# EAGLE board LMC303DLH_breakout (EAGLE 5.10)
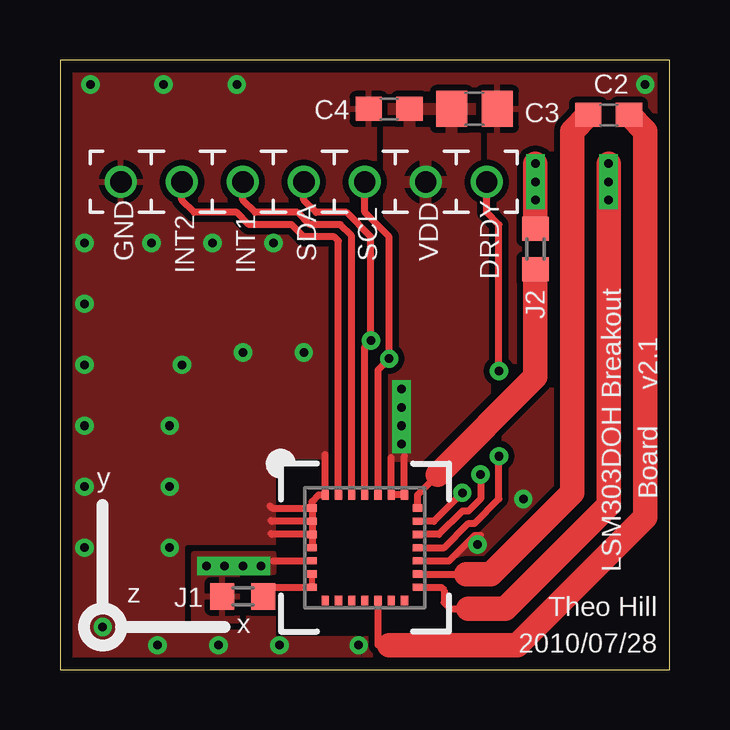
[diagram p0: board, top side]
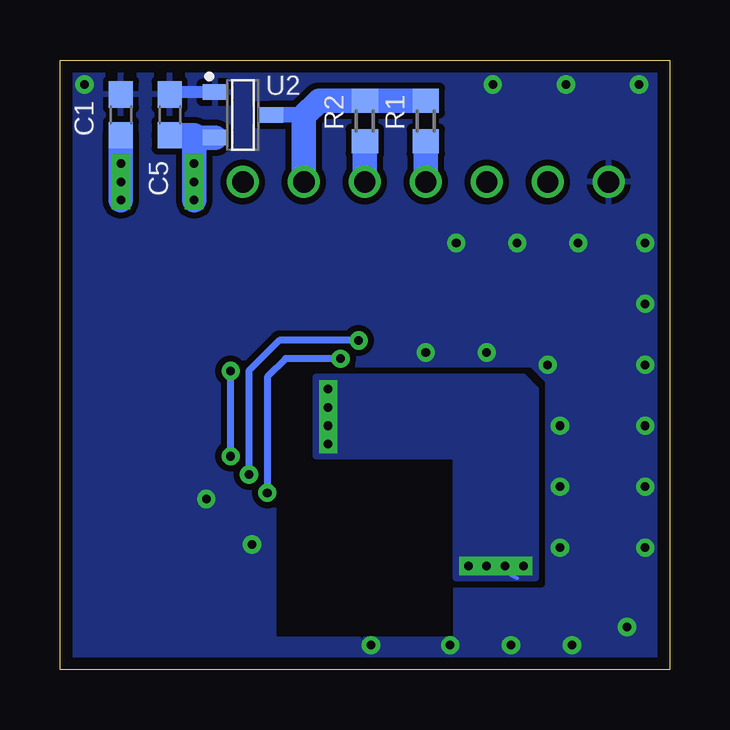
[diagram p1: board, bottom side, seen from below]

Size 25.4 x 25.4 mm. Coordinates in mm from the lower left corner, seen from the top.
Outline: 0,0 25.4,0 25.4,25.4 0,25.4 0,0
Copper layers (1*16): Top 0.0178mm / dielectric 1.4986mm / Bottom 0.0178mm
Design rules "sunstone_eagle_2lyr_rules_v1.0.0.3": minimum track width 6mil, minimum drill 14mil, track to track 6mil, track to pad 6mil, pad to pad 6mil, via to via 6mil, smd to smd 6mil, copper to edge 20mil, drill to drill 16mil, minimum pad ring 8mil, minimum via ring 8mil, stop-mask expansion 3mil, vias tented up to drill 0mil, thermal gap 10mil

## Footprints (pad centres in the part's own frame; a part is rotated, then mirrored left to right if it is on the bottom)
C0603 = smd 1.1 x 1: 1 -0.85,0; 2 0.85,0
C0805 = smd 1.3 x 1.5: 1 -0.95,0; 2 0.95,0
JUMPPAD = drill 0.889 round: PAD 0,0
ZJ-0603 = smd 1 x 1.1: 1 -0.85,0; 2 0.85,0
R0603 = smd 1 x 1.1: 1 -0.85,0; 2 0.85,0
LGA-28L(5X5X1) = smd 0.4 x 0.3: 1 -2.2,1.65; 2 -2.2,1.1; 3 -2.2,0.55; 4 -2.2,0; 5 -2.2,-0.55; 6 -2.2,-1.1; 7 -2.2,-1.65; 15 2.2,-1.65; 16 2.2,-1.1; 17 2.2,-0.55; 18 2.2,0; 19 2.2,0.55; 20 2.2,1.1; 21 2.2,1.65 | smd 0.3 x 0.4: 8 -1.65,-2.2; 9 -1.1,-2.2; 10 -0.55,-2.2; 11 0,-2.2; 12 0.55,-2.2; 13 1.1,-2.2; 14 1.65,-2.2; 22 1.65,2.2; 23 1.1,2.2; 24 0.55,2.2; 25 0,2.2; 26 -0.55,2.2; 27 -1.1,2.2; 28 -1.65,2.2
SOT-23-3 = smd 0.65 x 1.05: 1 -0.95,-1.15; 2 0.95,-1.15; 3 0,1.15

## Placement (x,y rotation side)
C1  4.7n  [C0603]  22.86,23.11 90 bottom
C2  220n  [C0603]  22.86,23.11 180 top
C3  10u  [C0805]  17.27,23.37 180 top
C4  100n  [C0603]  13.72,23.37 180 top
C5  1u  [C0603]  20.83,23.11 270 bottom
DRDY  JUMPPAD  [JUMPPAD]  17.78,20.32 0 top
GND  JUMPPAD  [JUMPPAD]  2.54,20.32 0 top
INT1  JUMPPAD  [JUMPPAD]  7.62,20.32 90 top
INT2  JUMPPAD  [JUMPPAD]  5.08,20.32 0 top
J1  JUMPER_ZEROOHM  [ZJ-0603]  7.62,3.05 180 top
J2  JUMPER_ZEROOHM  [ZJ-0603]  19.81,17.53 90 top
R1  10k  [R0603]  10.16,22.86 90 bottom
R2  10k  [R0603]  12.7,22.86 90 bottom
SCL  JUMPPAD  [JUMPPAD]  12.7,20.32 0 top
SDA  JUMPPAD  [JUMPPAD]  10.16,20.32 0 top
U1  LSM303DLH  [LGA-28L(5X5X1)]  12.7,5.08 0 top
U2  MCP1700  [SOT-23-3]  17.78,23.11 270 bottom
VDD  JUMPPAD  [JUMPPAD]  15.24,20.32 0 top

## Library data of the parts
C1-C5 R1 R2 = rcl
DRDY GND INT1 INT2 J1 J2 SCL SDA U1 U2 VDD = Compass

## Nets
1.8V: C5.2 J2.2 U2.2
1.8V-JUMP: J2.1 U1.21
C1: C1.1 U1.15
DRDY_M: DRDY.PAD U1.18
GND: C1.2 C3.1 C4.2 C5.1 GND.PAD U1.1 U1.2 U1.3 U1.4 U1.17 U1.28 U2.1
INT1: INT1.PAD U1.26
INT2: INT2.PAD U1.27
SCL: R2.1 SCL.PAD U1.20 U1.24
SDA: R1.1 SDA.PAD U1.19 U1.25
SET1: C2.2 U1.16
SET2: C2.1 U1.12
VDD: C3.2 C4.1 J1.2 R1.2 R2.2 U1.5 U1.22 U1.23 U2.3 VDD.PAD
VDD-JUMP: J1.1 U1.6 U1.7

## Tracks (layer width: path | path; a pad name or v marks a point on that pad's centre or on a via)
1.8V  (via drill 0.36)
  Top 1.016: v19.81,21.08 v19.81,20.32 v19.81,19.56 J2.2
  Bottom 1.016: v19.81,19.56 v19.81,21.08 19.81,22.16 | 19.81,22.16 U2.2 | 19.81,22.16 19.81,22.26 C5.2
1.8V-JUMP
  Top 0.3: U1.21 14.9,7.28 15.75,8.13
  Top 1.016: 15.75,8.13 19.81,12.19 J2.1
C1  (via drill 0.36)
  Top 0.3: U1.15 15.87,3.43 16,3.3 16,2.79 16.26,2.54 17.02,2.54
  Top 1.016: v22.86,21.08 v22.86,20.32 v22.86,19.56 22.86,6.86 18.54,2.54 17.02,2.54
  Bottom 1.016: v22.86,19.56 v22.86,21.08 C1.1
DRDY_M  (via drill 0.36)
  Top 0.3: v18.29,8.89 18.29,7.11 17.27,6.1 17.02,6.1 16,5.08 U1.18 | v18.29,12.45 18.29,18.54 17.78,19.05 DRDY.PAD
  Bottom 0.3: v18.29,8.89 v18.29,12.45
GND  (via drill 0.36)
  Top 0.3: U1.1 10.5,7 10.78,7.28 U1.28 11.05,8.97 | U1.3 U1.4 | U1.3 8.84,5.63 8.8,5.67 | U1.2 8.84,6.18 8.8,6.21 | U1.1 8.84,6.73 8.74,6.82 | U1.2 U1.3 | U1.1 U1.2 | U1.17 16.21,4.53 17.27,5.59 17.53,5.59
  Bottom 0.508: U2.1 20.73,24.06
  other vias: 17.4,5.21 1.27,24.38 4.32,24.38 7.37,24.38 1.02,17.78 8.89,17.78 12.45,1.02 9.14,1.02 6.6,1.02 4.06,1.02 1.78,1.78 1.02,5.08 4.57,7.62 4.57,10.16 5.08,12.7 1.02,7.62 1.02,10.16 1.02,12.7 1.02,15.24 3.81,17.78 7.62,13.21 6.35,17.78 24.38,24.38 4.57,5.08 10.16,13.21 19.3,7.11
  pour Bottom (isolate 0.254, rank 6): 0,25.4 0,0 12.7,0 12.7,1.27 8.89,1.27 8.89,8.89 16.51,8.89 16.51,1.27 12.95,1.27 12.95,0 25.4,0 25.4,25.4
  pour Top (isolate 0.254, rank 6): 0,25.4 0,0 12.45,0 12.45,1.27 8.89,1.27 8.89,8.89 16.51,8.89 16.51,1.27 12.7,1.27 12.7,0 25.4,0 25.4,25.4
INT1
  Top 0.3: U1.26 12.15,18.08 11.68,18.54 10.41,18.54 9.91,19.05 8.13,19.05 7.62,19.56 INT1.PAD
INT2
  Top 0.3: U1.27 11.6,17.86 11.43,18.03 10.16,18.03 9.65,18.54 7.87,18.54 7.37,19.05 5.59,19.05 5.08,19.56 INT2.PAD
SCL  (via drill 0.36)
  Top 0.3: U1.24 13.25,12.49 v13.72,12.95 13.72,18.03 12.7,19.05 SCL.PAD | U1.20 15.58,6.18 v16.76,7.37
  Bottom 0.3: v13.72,12.95 16,12.95 16.76,12.19 v16.76,7.37
  Bottom 1.016: SCL.PAD R2.1
SDA  (via drill 0.36)
  Top 0.3: SDA.PAD 10.16,19.56 10.67,19.05 11.94,19.05 12.95,18.03 v12.95,13.72 12.7,13.46 U1.25 | v17.53,8.13 17.53,7.11 17.02,6.6 16.76,6.6 15.79,5.63 U1.19
  Bottom 0.3: v12.95,13.72 16.26,13.72 17.53,12.45 v17.53,8.13
  Bottom 1.016: SDA.PAD R1.1
SET1
  Top 0.3: U1.16 16.93,3.98
  Top 1.016: C2.2 21.34,22.44 21.34,7.37 17.95,3.98 16.93,3.98
SET2
  Top 0.254: 13.72,1.02 13.5,1.23 | 14.22,1.02 13.25,1.02
  Top 0.3: 13.25,1.02 U1.12
  Top 1.016: C2.1 24.38,22.44 24.38,6.35 19.05,1.02 14.22,1.02 13.72,1.02
VDD  (via drill 0.36)
  Top 0.3: 14.35,8.89 U1.22 U1.23 | 8.89,4.53 U1.5 | U1.23 13.8,7.23 | U1.23 13.8,8.84
  Bottom 0.152: 7.37,4.32 6.35,3.81 | v14.22,10.16 13.97,10.16
  Bottom 0.254: v14.22,10.16 14.22,10.41 | 7.37,4.32 v7.62,4.32
  Bottom 0.65: U2.3 15.28,23.11 15.24,23.07
  Bottom 1.016: R1.2 R2.2 14.61,23.71 15.24,23.07 VDD.PAD
  other vias: 14.22,11.68 14.22,9.4 14.22,10.92 8.38,4.32 6.86,4.32 6.1,4.32
  pour Top (isolate 0.254): 17.78,11.68 14.99,8.89 13.72,8.89 13.72,23.62 17.27,23.62 17.27,21.59 17.27,18.8 17.78,18.8
  pour Top: 7.37,4.06 7.37,2.03 5.59,2.03 5.59,4.83 8.89,4.83 8.89,4.06
  pour Bottom (no thermals): 8.89,3.81 8.89,8.38 8.89,8.89 14.73,8.89 14.73,12.19 6.1,12.19 5.59,11.68 5.59,3.81
VDD-JUMP
  Top 0.254: J1.1 8.47,3.43 | U1.7 U1.6
  Top 0.3: 8.47,3.43 U1.7

## Text on the board
tPlace: v2.1 | y | Board | LSM303DOH Breakout | z | Theo Hill | x | 2010/07/28